# Altium PCB 飞控.PcbDoc
Units mil, origin at the board's own origin, x right, y up, seen from the top; angles counter-clockwise.
Board outline 1574.8 x 1574.8 mil, 2 copper layers (Top Layer, Bottom Layer); 50 components, 48 nets, 197 pads, 59 vias.
Unrouted connection lines stored in the file: 1.
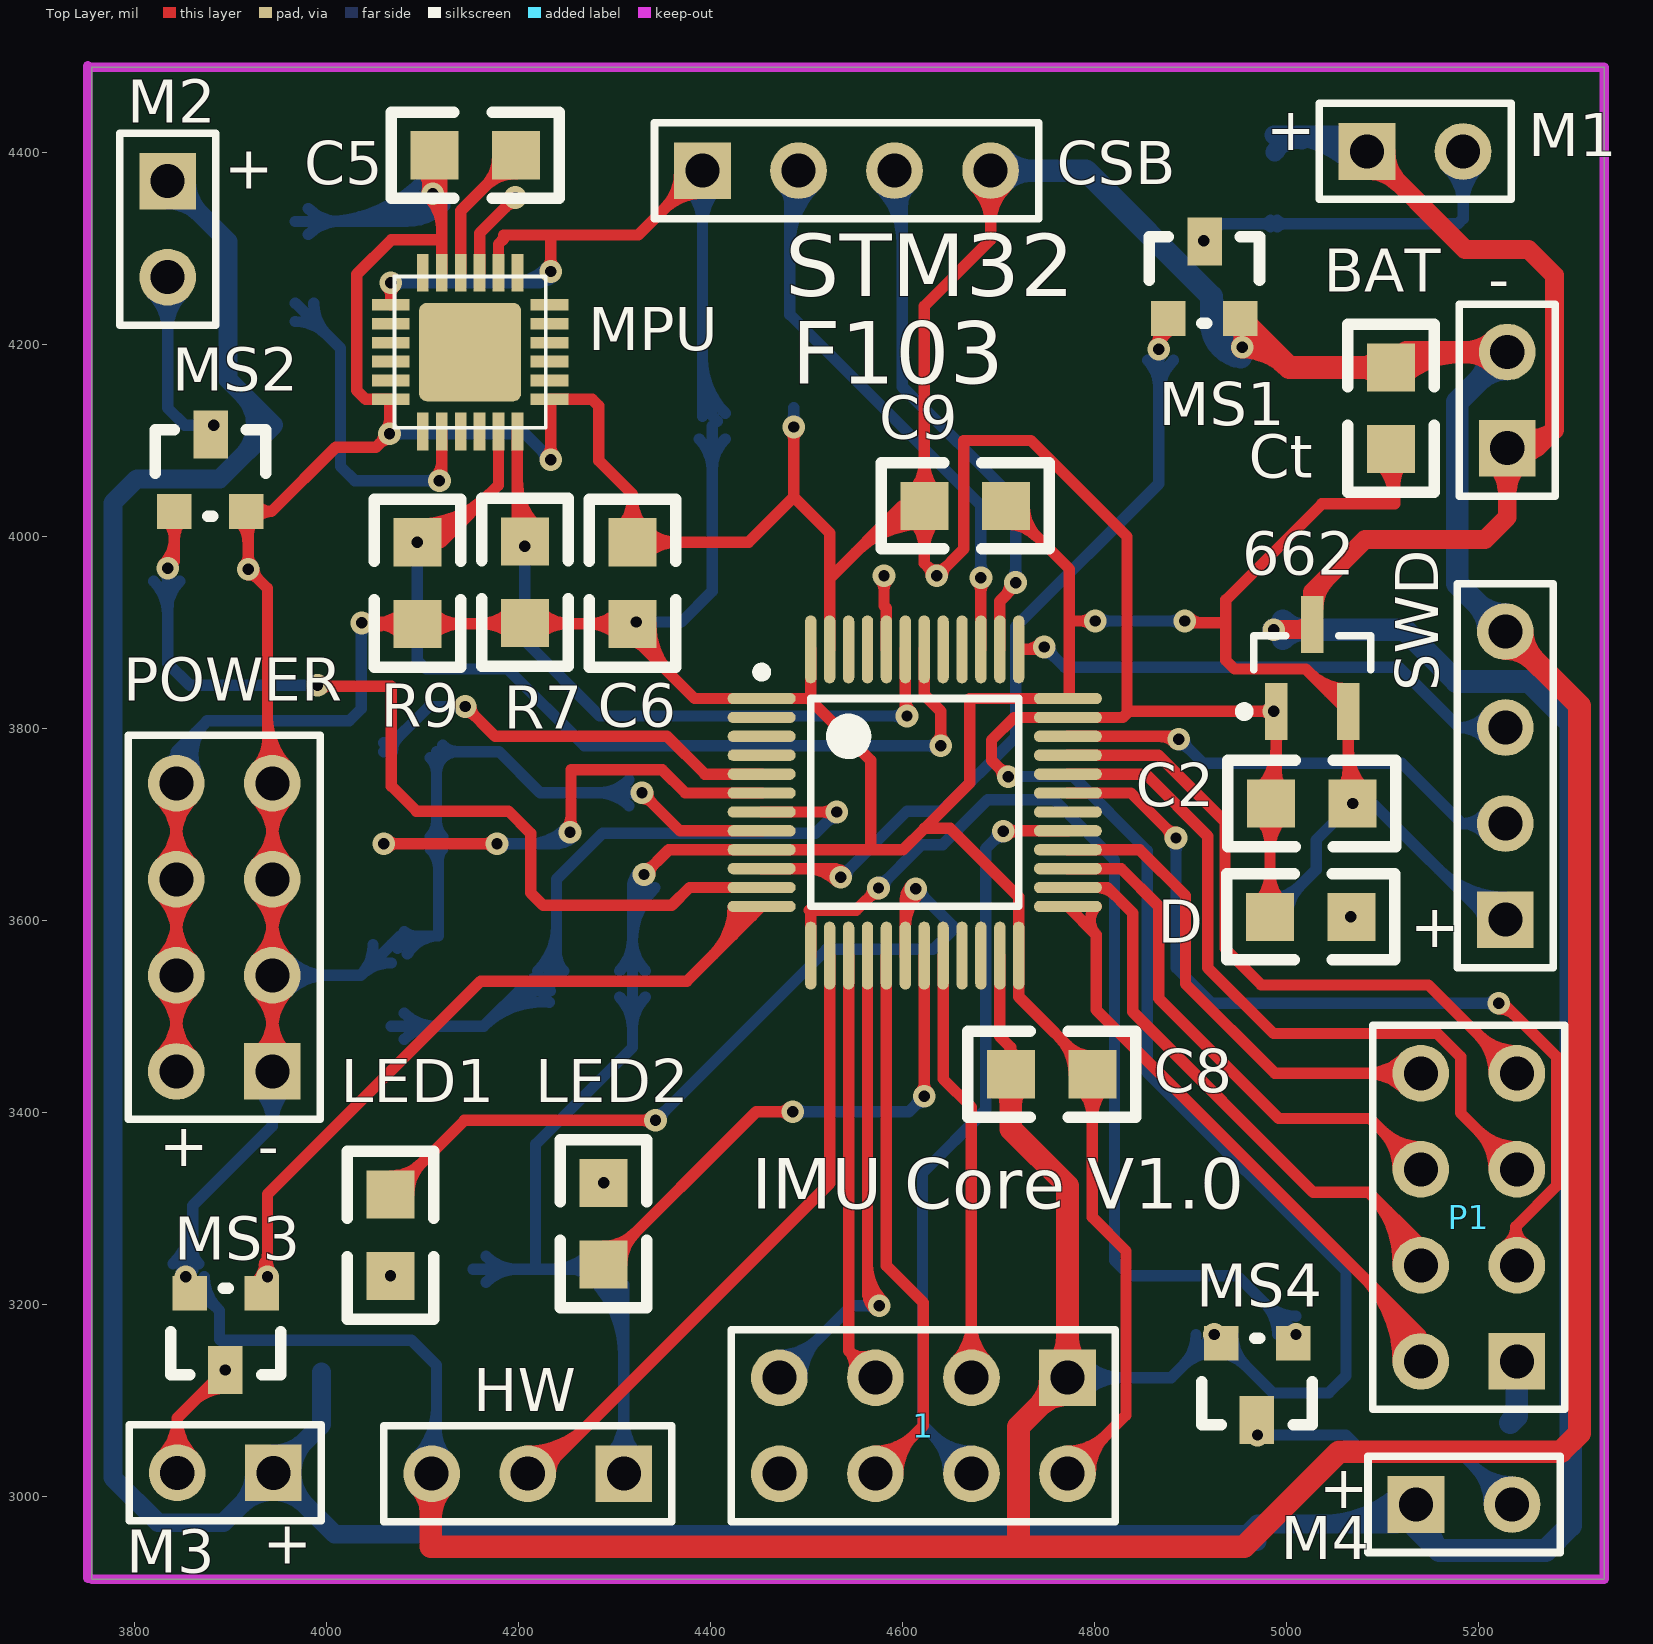
[diagram p0: Top Layer view]
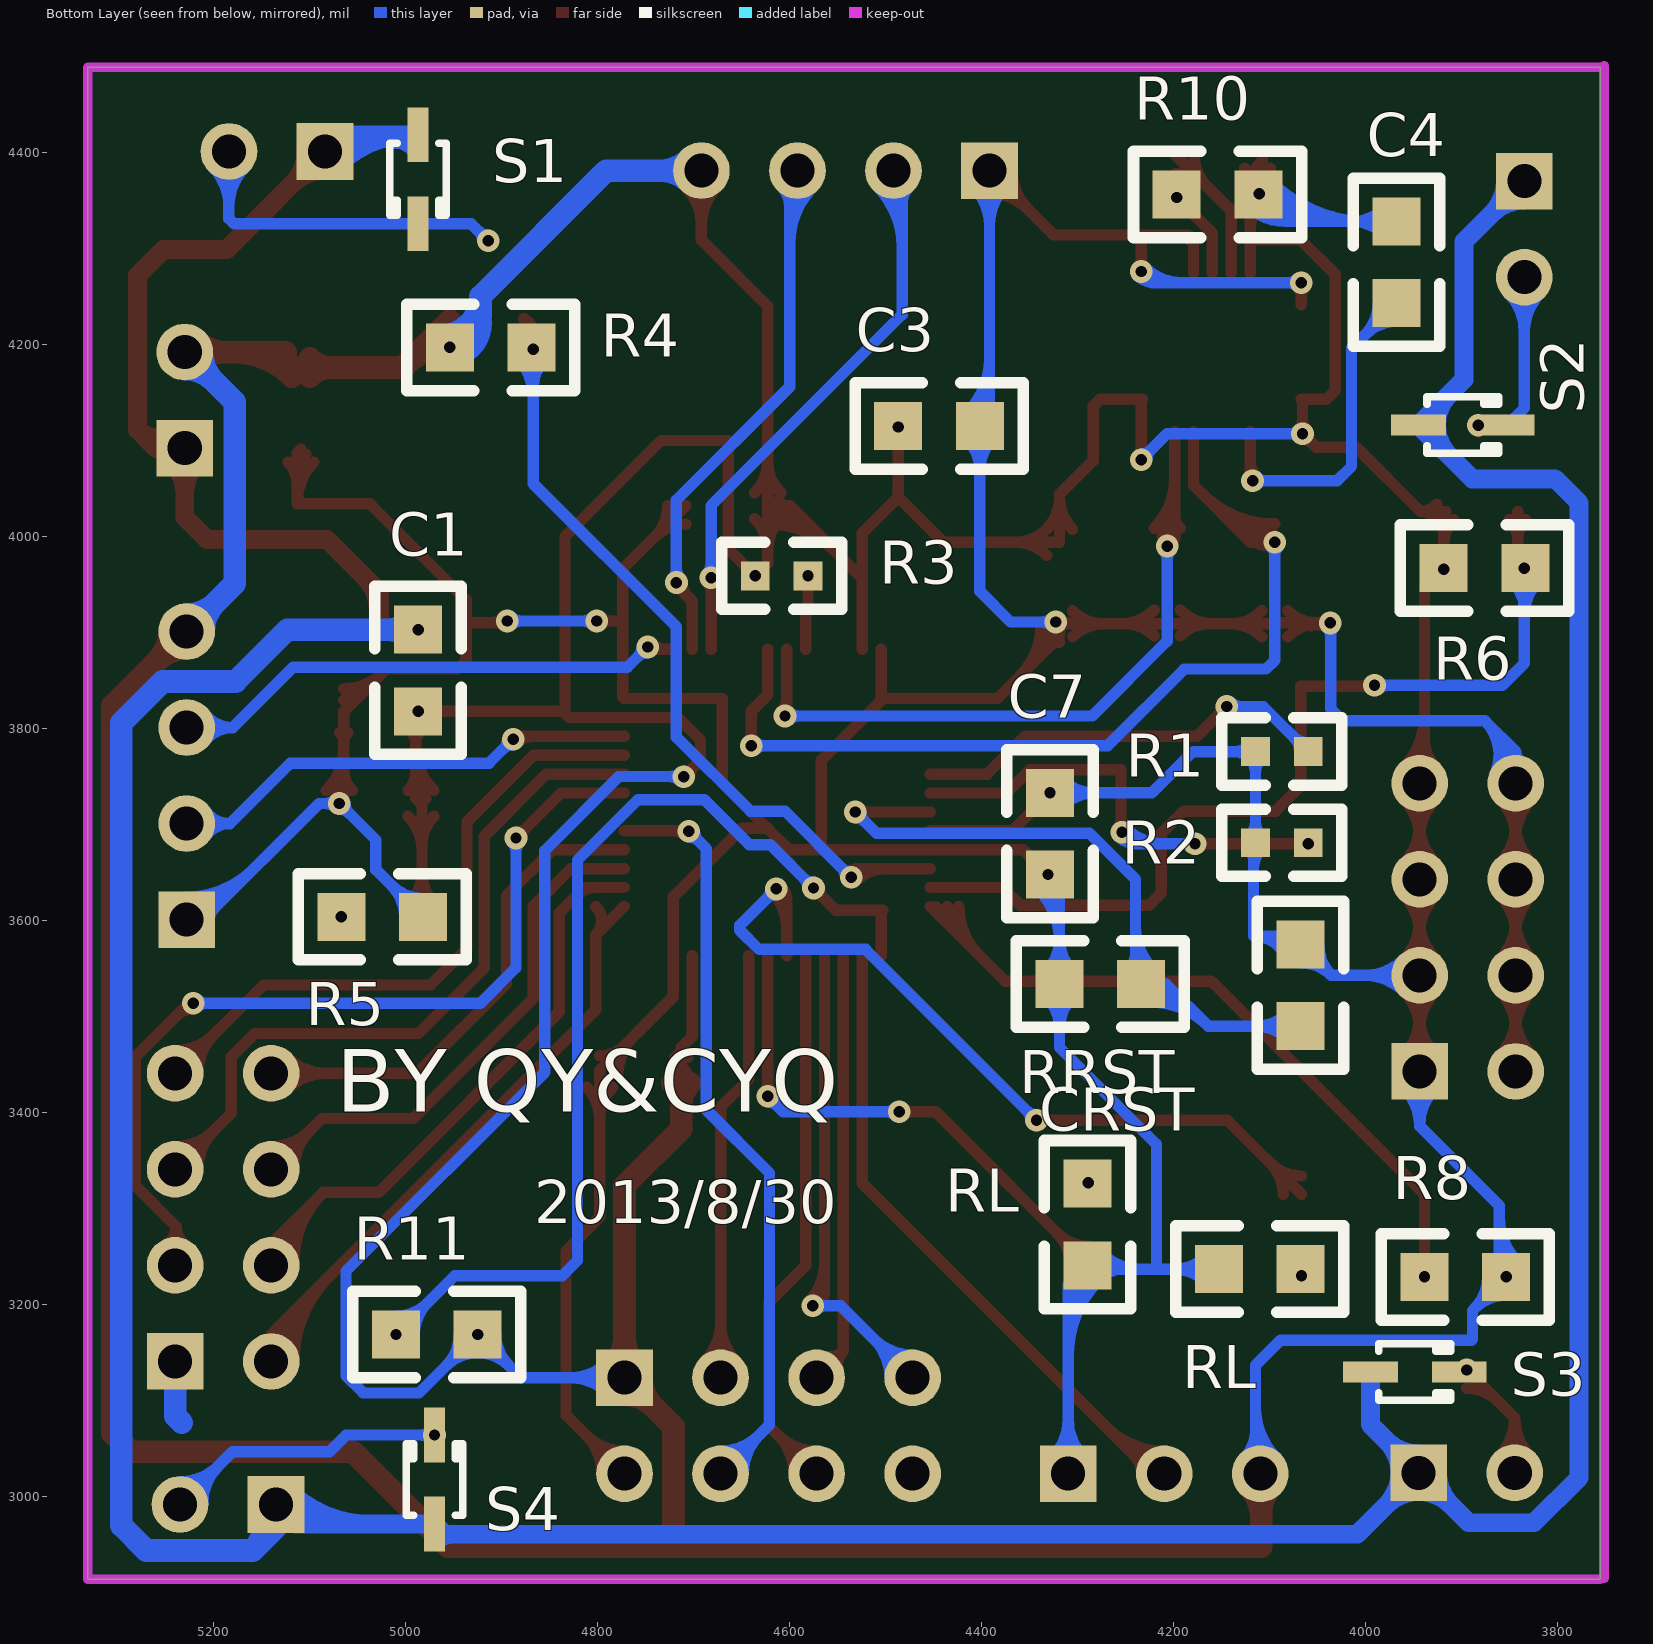
[diagram p1: Bottom Layer view, seen from below]

## Layer stack, top to bottom
Top Layer: signal copper 1.4
Dielectric: dielectric 12.6, FR-4, Dk 4.8
Bottom Layer: signal copper 1.4

## Board outline
3756,4488.8 3756,2914 5330.8,2914 5330.8,4488.8

## Design rules (kind name [scope] priority, off if disabled: settings)
Clearance [All] p1: gap=6
PolygonConnect [All] p1: connectstyle=Relief reliefconductorwidth=10 reliefentries=4 polygonreliefangle="90 Angle"
RoutingVias [All] p1: holewidth=11.81 width=23.62 viastyle="Through Hole" minholewidth=11.81 minwidth=23.62 maxholewidth=28 maxwidth=50
SilkscreenOverComponentPads SilkToSolderMaskClearance [IsPad] p1: minsilkscreentomaskgap=10
SolderMaskExpansion [All] p1: expansion=4
Width [All] p1: maxlimit=23.62 minlimit=10 preferedwidth=11.81
27 further rules are at their usual default settings.

## Classes and differential pairs
component class 比赛飞控: C1 C2 C3 C4 C5 C6 C7 C8 C9 CRST1 LED1 LED2 MS1 MS2 MS3 MS4 P1 P8 R1 R2 R3 R4 R5 R6 R7 R8 R9 R10 R11 S1 S2 S3 S4

## Components (designator, comment, footprint, x,y, rotation, side; value= is the part's Value field where it differs from the comment)
1 "24L01" HDR2X4 4772,3124 r180 top
662 "6206" SOT346-3AN 5027,3863 r90 top (schematic designator u2)
BAT "Header 2" HDR1X2 5230,4092 r90 top (schematic designator BAT1)
C1 "Cap" 0805 4987,3898 r270 bottom
C2 "Cap" 0805 5064,3722 r180 top
C3 "Cap" 0805 4407,4115 r0 bottom
C4 "Cap" 0805 3968,4248 r90 bottom
C5 "Cap" 0805 4118,4397 r0 top
C6 "Cap" 0805 4319,3989 r270 top
C7 "Cap" 0805 4329,3728 r270 bottom
C8 "Cap" 0805 4718,3440 r0 top
C9 "Cap" 0805 4628,4032 r0 top
CRST "Cap" 0805 4068,3495 r90 bottom (schematic designator CRST1)
CSB "" HDR1X4 4392,4381 r0 top (schematic designator CSB1)
Ct "Cap" 0805 5109,4171 r270 top (schematic designator Ctan1)
D "LED" 0805 5063,3604 r180 top (schematic designator D1)
HW "Header 3" HDR1X3 4310,3024 r180 top (schematic designator HW1)
LED1 "LED" 0805 4067,3235 r90 top
LED2 "LED" 0805 4289,3322 r270 top
M1 "Header 2" HDR1X2 5084,4401 r0 top (schematic designator P2)
M2 "Header 2" HDR1X2 3835,4370 r270 top (schematic designator P3)
M3 "Header 2" HDR1X2 3945,3025 r180 top (schematic designator P4)
M4 "Header 2" HDR1X2 5135,2992 r0 top (schematic designator P5)
MPU "MPU6050" QFN-24 4150,4192 r180 top (schematic designator U3)
MS1 "TP2302" SOT-23 4877,4227 r0 top
MS2 "TP2302" SOT-23 3842,4026 r0 top
MS3 "TP2302" SOT-23 3933,3212 r180 top
MS4 "TP2302" SOT-23 5007,3160 r180 top
P1 "Header 4X2" HDR2X4 5240,3141 r90 top
POWER "Power" HDR2X4 3944,3443 r90 top (schematic designator POWER1)
R1 "Res1" 0603 4115,3776 r180 bottom
R2 "Res1" 0603 4115,3681 r180 bottom
R3 "Res1" 0603 4636,3959 r180 bottom
R4 "Res2" 0805 4874,4197 r0 bottom
R5 "Res1" 0805 5062,3604 r180 bottom
R6 "Res2" 0805 3839,3967 r0 bottom
R7 "Res1" 0805 4207,3990 r270 top
R8 "Res2" 0805 3934,3229 r180 bottom
R9 "Res1" 0805 4095,3989 r270 top
R10 "Res1" 0805 4117,4356 r0 bottom
R11 "Res2" 0805 5005,3169 r180 bottom
RL "Res1" 0805 4290,3246 r90 bottom (schematic designator RLED2)
RL "Res1" 0805 4148,3237 r180 bottom (schematic designator RLED1)
RRST "Res1" 0805 4239,3534 r0 bottom (schematic designator RRST1)
S1 "ss14" SOD-323 4987,4372 r270 bottom
S2 "ss14" SOD-323 3899,4116 r180 bottom
S3 "ss14" SOD-323 3949,3130 r180 bottom
S4 "ss14" SOD-323 4970,3018 r90 bottom
STM32 "STM32F103CBT6" LQFP48_N 4613,3723 r0 top (schematic designator U1)
SWD "Header 4" HDR1X4 5228,3601 r90 top (schematic designator SWD1)

## Footprints (in the part's own frame and the unit in brackets; to place one, negate y for a bottom-side part, rotate by r counter-clockwise, add the part's x,y. Pads: shape width x height; smd on the part's side, far side on the other; paste and mask are expansions set on the pad)
0603 [mil]
  rect 30x30 smd: 1(0,0) 2(55,0)
  silkscreen extent -35,-35 90,35
0805 [mil]
  rect 50x50 smd: 1(-5,0) 2(80,0)
  silkscreen extent -50,-45 125,45
HDR1X2 [mm] "Connector; Header; 2"
  rect 1.5x1.5 hole 0.9: 1(0,0)
  round 1.5 hole 0.9: 2(2.54,0)
  silkscreen extent -1.27,-1.27 3.81,1.27
HDR1X3 [mm] "Connector; Header; 3"
  rect 1.5x1.5 hole 0.9: 1(0,0)
  round 1.5 hole 0.9: 2(2.54,0) 3(5.08,0)
  silkscreen extent -1.27,-1.27 6.35,1.27
HDR1X4 [mm] "Connector; Header; 4"
  rect 1.5x1.5 hole 0.9: 1(0,0)
  round 1.5 hole 0.9: 2(2.54,0) 3(5.08,0) 4(7.62,0)
  silkscreen extent -1.27,-1.27 8.89,1.27
HDR2X4 [mm] "Connector; Header; 4x2"
  rect 1.5x1.5 hole 0.9: 1(0,0)
  round 1.5 hole 0.9: 2(0,2.54) 3(2.54,0) 4(2.54,2.54) 5(5.08,0) 6(5.08,2.54) 7(7.62,0) 8(7.62,2.54)
  silkscreen extent -1.27,-1.27 8.89,3.81
LQFP48_N [mm] "Thin QFP, 48-Leads, Body 7x7mm, Pitch 0.5mm, IPC Mediu"
  oval 1.8x0.3 smd: 1(-4.05,2.75) 2(-4.05,2.25) 3(-4.05,1.75) 4(-4.05,1.25) 5(-4.05,0.75) 6(-4.05,0.25) 7(-4.05,-0.25) 8(-4.05,-0.75) 9(-4.05,-1.25) 10(-4.05,-1.75) 11(-4.05,-2.25) 12(-4.05,-2.75) 25(4.05,-2.75) 26(4.05,-2.25) 27(4.05,-1.75) 28(4.05,-1.25) 29(4.05,-0.75) 30(4.05,-0.25) 31(4.05,0.25) 32(4.05,0.75) 33(4.05,1.25) 34(4.05,1.75) 35(4.05,2.25) 36(4.05,2.75)
  oval 0.3x1.8 smd: 13(-2.75,-4.05) 14(-2.25,-4.05) 15(-1.75,-4.05) 16(-1.25,-4.05) 17(-0.75,-4.05) 18(-0.25,-4.05) 19(0.25,-4.05) 20(0.75,-4.05) 21(1.25,-4.05) 22(1.75,-4.05) 23(2.25,-4.05) 24(2.75,-4.05) 37(2.75,4.05) 38(2.25,4.05) 39(1.75,4.05) 40(1.25,4.05) 41(0.75,4.05) 42(0.25,4.05) 43(-0.25,4.05) 44(-0.75,4.05) 45(-1.25,4.05) 46(-1.75,4.05) 47(-2.25,4.05) 48(-2.75,4.05)
  silkscreen extent -4.17,-2.75 2.75,3.57, body extent -3.5,-3.5 3.5,3.5, height 1.6
QFN-24 [mm]
  rrect15% 2.7x2.6 smd: 0(0,0)
  rect 1x0.31 smd: 1(-2.1,1.25) 2(-2.1,0.75) 3(-2.1,0.25) 4(-2.1,-0.25) 5(-2.1,-0.75) 6(-2.1,-1.25) 13(2.1,-1.25) 14(2.1,-0.75) 15(2.1,-0.25) 16(2.1,0.25) 17(2.1,0.75) 18(2.1,1.25)
  rect 0.31x1 smd: 7(-1.25,-2.1) 8(-0.75,-2.1) 9(-0.25,-2.1) 10(0.25,-2.1) 11(0.75,-2.1) 12(1.25,-2.1) 19(1.25,2.1) 20(0.75,2.1) 21(0.25,2.1) 22(-0.25,2.1) 23(-0.75,2.1) 24(-1.25,2.1)
  silkscreen extent -2,-2 2,2
SOD-323 [mm] "SOD-323/SC-76; 2 Leads; Body 1.7 x 1.3"
  rect 1.45x0.55 smd: 1(1.175,0) 2(-1.175,0)
  silkscreen extent -0.95,-0.75 0.95,0.75
SOT346-3AN [mm] "SOT346, 3-Leads, Body 2.9x1.5mm, Pitch 0.95mm, Lead Span 2.6mm, IPC Mediu"
  rect 1.5x0.6 smd: 1(-1.15,0.95) 2(-1.15,-0.95) 3(1.15,0)
  silkscreen extent -1.27,-1.55 0.85,1.92, body extent -0.85,-1.55 0.85,1.55, height 1.45
SOT-23 [mil]
  rect 36x36 smd: 1(0,0) 2(75,0)
  rect 36x50 smd: 3(38,80)
  silkscreen extent -20,-5 95,85

## Part data
1 POWER: library part "Header 4X2", "Header, 4-Pin, Dual row"
BAT M1 M2 M3 M4: "Header, 2-Pin"
CSB: library part "Header 4", "Header, 4-Pin"
D LED1 LED2: library part LED3, "T"
HW: "Header, 3-Pin"
MPU: "Hex-A"
P1: "Header, 4-Pin, Dual row"
S1 S2 S3 S4: library part "Diode 1N5406", "3 Amp General Purpose Rectifier"
STM32: "STM32 ARM-based 32-bit MCU with 128 Kbytes Flash, 48-pin LQFP, Industrial Temperature"
SWD: "Header, 4-Pin"

## Via types
v1: diameter 23.62, hole 11.81, Top Layer to Bottom Layer, 59 vias

## Nets (pads, with @x,y where several pads share a name; then routed paths per layer and width w, separated by ;. In a path a pad name is that pad's centre, name@x,y a point inside that pad or via, vN(x,y) a via of type N, cw(c..) or ccw(c..) an arc to the next point about the centre after c; other vN are vias at no path point)
CE: 1.3 STM32.20 | length 541.3
  Top Layer w11.81: STM32.20 4642.53,3435.2 4672,3405.73 1.3 ; 1.3@4655.3,3140.7 ccw(c4614.97,3181.03) 4672,3181.03 ccw(c4729.03,3181.03) 1.3@4688.7,3140.7
CSN: 1.4 STM32.29 | length 926.9
  Top Layer w11.81: v1(4705,3693) 4705.47,3693.47 STM32.29 ; v1@4709.18,3688.82 cw(c4720.4,3677.6) 4720.4,3693.47 ; v1@4709.18,3697.18 ccw(c4718.12,3706.12) 4718.12,3693.47
  Bottom Layer w11.81: 1.4@4648.38,3024 ccw(c4591.35,3024) 4631.67,3064.33 ccw(c4672,3104.65) 1.4@4672,3047.62 ; 1.4 4621,3075 4621,3337 4687,3403 4687,3675 v1(4705,3693) ; v1@4699.09,3693 cw(c4684.84,3693) 4694.92,3682.92 cw(c4705,3672.84) v1@4705,3687.09
ECHO: CSB.3 STM32.38 | length 730.3
  Top Layer w11.81: STM32.38 4701.58,3932.58 4718,3949 v1(4718,3952) ; 4705.8,3936.8 ccw(c4690.59,3952) v1@4712.09,3952
  Bottom Layer w11.81: CSB.3@4575.3,4364.3 cw(c4515.66,4304.66) 4600,4304.66 ; CSB.3@4583.65,4372.65 cw(c4544.17,4333.17) 4600,4333.17 ; CSB.3 4600,4373 4600,4156 4718,4038 v1(4718,3952) ; 4600,4343.29 cw(c4629.71,4343.29) CSB.3@4608.7,4364.3 ; v1@4713.82,3956.18 ccw(c4703.74,3966.26) 4718,3966.26 ccw(c4732.26,3966.26) v1@4722.18,3956.18
GND: 1.1 662.1 BAT.2 C1.2 C2.2 C3.2 C4.2 C5.1 C6.1 C7.1 C8.1 C9.1 CRST.2 CSB.4 Ct.1 D.2 HW.3 MPU.1 MPU.11 MPU.18 MS1.2 MS2.2 MS3.2 MS4.2 P1.1 POWER.1 POWER.3 POWER.5 POWER.7 R1.1 R2.1 R3.1 R4.2 R6.2 R8.2 R10.1 R11.2 STM32.8 STM32.23 STM32.35 STM32.47 SWD.4 | length 15606.1
  Top Layer w11.81: MS3.2@3850.97,3223.93 cw(c3843.56,3211.54) MS3.2@3858,3211.54 ; v1(3854,3229) 3858,3225 MS3.2 ; MS2.2@3908.45,4017.45 cw(c3882.97,3991.97) 3919,3991.97 ; v1@3914.82,3970.18 ccw(c3904.74,3980.26) 3919,3980.26 ccw(c3933.26,3980.26) v1@3923.18,3970.18 ; v1@3919,3960.09 cw(c3919,3945.84) 3929.08,3955.92 cw(c3939.16,3966) v1@3924.91,3966 ; 3919,4001.63 cw(c3941.37,4001.63) MS2.2@3925.55,4017.45 ; MS2.2@3926.25,4018.21 cw(c3943,4004.1) 3943,4026 ; MS2.2@3926.25,4033.79 ccw(c3943,4047.9) 3943,4026 ; POWER.1@3927.3,3459.7 ccw(c3886.97,3500.03) 3944,3500.03 ccw(c4001.03,3500.03) POWER.1@3960.7,3459.7 ; POWER.3@3927.3,3526.3 cw(c3886.97,3485.97) 3944,3485.97 cw(c4001.03,3485.97) POWER.3@3960.7,3526.3 ; POWER.3@3927.3,3559.7 ccw(c3886.97,3600.03) 3944,3600.03 ccw(c4001.03,3600.03) POWER.3@3960.7,3559.7 ; POWER.5@3927.3,3626.3 cw(c3886.97,3585.97) 3944,3585.97 cw(c4001.03,3585.97) POWER.5@3960.7,3626.3 ; POWER.5@3927.3,3659.7 ccw(c3886.97,3700.03) 3944,3700.03 ccw(c4001.03,3700.03) POWER.5@3960.7,3659.7 ; POWER.7@3927.3,3726.3 cw(c3886.97,3685.97) 3944,3685.97 cw(c4001.03,3685.97) POWER.7@3960.7,3726.3 ; POWER.7@3927.3,3759.7 ccw(c3899.04,3787.96) 3939,3787.96 ; 3939,3783.59 ccw(c3984.59,3783.59) POWER.7@3952.35,3751.35 ; 3939,3812.1 ccw(c4013.1,3812.1) POWER.7@3960.7,3759.7 ; POWER.1 POWER.3 POWER.5 POWER.7 3939,3748 3939,3946 v1(3919,3966) 3919,4024 MS2.2 3943,4026 ; v1@4060.09,4107 cw(c4045.84,4107) 4055.92,4096.92 cw(c4066,4086.84) v1@4066,4101.09 ; v1@4061.82,4111.18 ccw(c4051.74,4121.26) 4066,4121.26 ccw(c4080.26,4121.26) v1@4070.18,4111.18 ; C5.1@4099.5,4383.5 cw(c4048.86,4332.86) 4120.47,4332.86 ; C5.1@4099.79,4383.21 cw(c4074.64,4356.95) v1(4111,4357) cw(c4140.47,4356.95) C5.1@4123.8,4381.25 ; C5.1@4101.27,4380.71 cw(c4076.17,4364.71) v1@4105.23,4358.28 ; v1@4105.89,4359.95 ccw(c4093.57,4367.06) 4107.31,4370.74 ; v1@4106.82,4352.82 cw(c4073.87,4319.87) 4120.47,4319.87 ; v1@4106.82,4361.18 ccw(c4096.74,4371.26) 4111,4371.26 ccw(c4125.26,4371.26) 4115.18,4361.18 cw(c4102.39,4348.39) 4120.47,4348.39 ; 4107.29,4370.8 ccw(c4121.1,4374.5) v1@4113.95,4362.11 ; v1@4107.61,4352.16 cw(c4089.39,4326.13) 4120.69,4331.65 ; C5.1@4107.85,4391.85 cw(c4077.38,4361.38) v1@4120.47,4361.38 ; v1@4108.05,4362.11 ccw(c4100.9,4374.5) 4114.71,4370.8 ; C5.1@4110.44,4378.08 cw(c4108.89,4366.6) 4120.47,4366.6 ; v1(4111,4357) C5.1@4111,4377 ; 4114.69,4370.74 ccw(c4128.42,4367.06) v1@4116.11,4359.95 ; MPU.11 4120.47,4309 ; 4120.47,4367.53 4120.47,4309 ; v1@4229.82,4084.18 ccw(c4219.74,4094.26) 4234,4094.26 ccw(c4248.26,4094.26) v1@4238.18,4084.18 ; v1(4234,4080) 4234,4141.46 MPU.1 4277.21,4142.79 4284,4136 4284,4079 4319,4044 C6.1 4440,3994 4487,4041 ; C6.1@4305.5,4007.5 ccw(c4272.9,4040.1) 4319,4040.1 ccw(c4365.1,4040.1) 4332.5,4007.5 ccw(c4365.1,4040.1) 4365.1,3994 ccw(c4365.1,3947.9) C6.1@4332.5,3980.5 ; v1@4329,3727.09 cw(c4329,3712.84) 4339.08,3722.92 cw(c4349.16,3733) v1@4334.91,3733 ; v1(4329,3733) 4368.53,3693.47 STM32.8 ; v1@4482.82,4109.82 cw(c4472.74,4099.74) 4487,4099.74 cw(c4501.26,4099.74) v1@4491.18,4109.82 ; v1(4487,4114) 4487,4041 ; STM32.47 4524.42,3956.42 ; 4551.14,3983.14 cw(c4623,3911.28) C9.1@4623,4012.91 ; 4571.3,4003.3 cw(c4623,3951.61) C9.1@4623,4024.72 ; 4591.47,4023.47 cw(c4623,3991.93) C9.1@4623,4036.53 ; C9.1@4609.5,4018.5 cw(c4576.9,3985.9) 4623,3985.9 cw(c4669.1,3985.9) C9.1@4636.5,4018.5 ; C9.1@4609.5,4045.5 ccw(c4576.9,4078.1) 4623,4078.1 ccw(c4669.1,4078.1) C9.1@4636.5,4045.5 ; v1@4630.09,3959 ccw(c4615.84,3959) 4625.92,3969.08 ccw(c4636,3979.16) 4636,3964.91 ccw(c4636,3979.16) 4646.08,3969.08 ccw(c4656.16,3959) v1@4641.91,3959 ; CSB.4@4675.3,4364.3 cw(c4634.97,4323.97) 4692,4323.97 cw(c4749.03,4323.97) CSB.4@4708.7,4364.3 ; CSB.4 4692,4309 4623,4240 C9.1 ; STM32.23 4701.58,3479.42 4713,3468 ; v1@4704.35,3749.72 ccw(c4690.09,3749.72) 4700.18,3759.8 ccw(c4710.26,3769.88) v1@4710.26,3755.62 ; C8.1@4706.03,3457.78 ccw(c4702.02,3468) 4713,3468 ; v1(4710.26,3749.72) 4693,3766.97 4693,3788 4716.58,3811.58 STM32.35 4829.58,3811.58 4834,3816 ; C8.1 4713,3468 ; C8.1@4719.97,3457.78 cw(c4723.98,3468) 4713,3468 ; v1(4925,3169) 4925,3167 MS4.2 ; MS1.2@4944.26,4217.7 cw(c4926.98,4196.93) v1@4954,4196.93 ; v1@4948.93,4200.02 ccw(c4937.27,4206.96) 4950.37,4210.47 ccw(c4963.4,4213.96) v1@4956.86,4202.17 ; v1@4949.82,4201.18 ccw(c4939.74,4211.26) 4954,4211.26 ccw(c4968.26,4211.26) v1@4958.18,4201.18 ; MS1.2 4954,4225 v1(4954,4197) ; v1@4954,4202.63 cw(c4976.37,4202.63) MS1.2@4960.55,4218.45 ; MS1.2@4956.34,4211.38 ccw(c4967.97,4208.26) v1@4958.6,4200.71 ; D.2@4969.5,3617.5 ccw(c4936.9,3650.1) 4983,3650.1 ccw(c5029.1,3650.1) D.2@4996.5,3617.5 ; C2.2@4970.5,3708.5 cw(c4940.32,3678.32) 4983,3678.32 ; C2.2@4970.5,3735.5 ccw(c4924.39,3781.61) 4989.6,3781.61 ; 4974.68,3818 cw(c4974.68,3802.8) 662.1@4985.42,3813.55 ; v1@4976.01,3818 ccw(c4976.01,3831.32) 662.1@4985.42,3821.9 ; C2.2@4978.85,3727.15 ccw(c4952.9,3753.1) 4989.6,3753.1 ; 662.1@4982.82,3822.18 cw(c4972.74,3832.26) 4972.74,3818 cw(c4972.74,3803.74) 4982.82,3813.82 cw(c4966.47,3797.47) 662.1@4989.6,3797.47 ; D.2 4983,3721 C2.2 4989.6,3727.6 662.1 ; 4983,3673.49 cw(c5032.51,3673.49) C2.2@4997.5,3708.5 ; 662.1@4985.42,3795.83 cw(c4975.34,3785.75) 4989.6,3785.75 cw(c5003.86,3785.75) 662.1@4993.77,3795.83 ; v1(4987,3818) 4836,3818 4834,3816 ; 4989.6,3754.58 ccw(c5016.58,3754.58) C2.2@4997.5,3735.5 ; Ct.1 Ct.1@5125,4192 ; 3943,4026 4010,4093 4052,4093 v1(4066,4107) 4066,4141.46 MPU.18 4041.21,4142.79 4032,4152 4032,4273 4068,4309 4120.47,4309 ; 4487,4041 4524.42,4003.58 4524.42,3956.42 ; 4524.42,3956.42 4600,4032 C9.1 ; C9.1 4623,3972 v1(4636,3959) 4664,3987 4664,4100 4734,4100 4834,4000 4834,3816 ; 4120.47,4368.94 cw(c4141.06,4368.94) 4126.5,4383.5 ccw(c4141.06,4368.94) 4120.47,4368.94
  Top Layer w23.62: HW.3@4097.47,3011.47 cw(c4069.64,2983.64) 4109,2983.64 ; 4109,2978.81 cw(c4155.19,2978.81) HW.3@4122.53,3011.47 ; HW.3 4109,3023 4109,2948 4721,2948 ; C8.1@4703.67,3430.67 cw(c4681.16,3408.16) 4713,3408.16 cw(c4744.84,3408.16) C8.1@4722.33,3430.67 ; C8.1 4713,3383 4772,3324 1.1 4721,3073 4721,2948 ; 1.1@4754.28,3124 cw(c4711.51,3124) 4741.76,3093.76 cw(c4772,3063.51) 1.1@4772,3106.28 ; 1.1@4759.47,3136.53 ccw(c4729.23,3166.77) 4772,3166.77 ccw(c4814.77,3166.77) 1.1@4784.53,3136.53 ; v1(4954,4197) cw(c4954,4129.4) 5001.8,4177.2 ; MS1.2@4954,4225 5003,4176 Ct.1 ; Ct.1@5099.67,4166.67 ccw(c5077.16,4144.16) 5077.16,4176 ccw(c5077.16,4207.84) Ct.1@5099.67,4185.33 ; Ct.1@5118.33,4166.67 cw(c5179.47,4105.53) 5179.47,4192 ; Ct.1@5125,4192 BAT.2 ; BAT.2@5217.47,4179.47 ccw(c5187.23,4149.23) 5187.23,4192 ccw(c5187.23,4234.77) BAT.2@5217.47,4204.53 ; SWD.4@5228,3883.28 cw(c5228,3840.51) 5258.24,3870.76 cw(c5288.49,3901) SWD.4@5245.72,3901 ; SWD.4 5305.15,3823.85 5305.15,3066.15 5286,3047 5055,3047 4956,2948 4721,2948
  Bottom Layer w11.81: R8.2@3840.5,3242.5 ccw(c3791,3292) 3861,3292 ; R8.2@3848.85,3234.15 ccw(c3819.52,3263.48) 3861,3263.48 ; R8.2@3849.82,3233.18 ccw(c3822.84,3260.16) 3861,3260.16 ; R8.2@3854,3209.91 cw(c3854,3163.81) 3886.6,3196.4 cw(c3919.19,3229) R8.2@3873.09,3229 ; R8.2@3854,3223.09 cw(c3854,3208.84) 3864.08,3218.92 cw(c3874.16,3229) R8.2@3859.91,3229 ; R8.2@3857.56,3249.23 ccw(c3870.5,3241.75) R8.2@3858.67,3232.61 ; 3861,3258.2 ccw(c3883.2,3258.2) R8.2@3867.5,3242.5 ; v1(3919,3966) R6.2 ; POWER.1@3927.3,3426.29 cw(c3887.05,3386) 3944,3386 ; POWER.1 3944,3386 ; POWER.3 4036,3543 ; POWER.1@3960.7,3426.29 ccw(c4000.95,3386) 3944,3386 ; POWER.3@3960.7,3526.3 cw(c4001.03,3485.97) 4001.03,3543 cw(c4001.03,3600.03) POWER.3@3960.7,3559.7 ; C4.2 4082,4328 ; C4.2@3981.5,4314.5 cw(c4014.1,4281.9) 4014.1,4328 cw(c4014.1,4374.1) C4.2@3981.5,4341.5 ; 3998.3,4328 ccw(c3998.3,4469.7) R10.1@4098.5,4369.5 ; 4026.82,4328 ccw(c4026.82,4441.18) R10.1@4106.85,4361.15 ; CRST.2@4048.91,3574.75 cw(c4004.84,3574.17) 4036,3543 ; 4055.33,4328 ccw(c4055.33,4412.67) R10.1@4115.2,4352.8 ; v1(4066,4107) 4207,4107 v1(4234,4080) ; CRST.2@4067.75,3555.91 ccw(c4067.17,3511.84) 4036,3543 ; v1@4070.18,4102.82 cw(c4080.26,4092.74) 4080.26,4107 cw(c4080.26,4121.26) v1@4070.18,4111.18 ; CRST.2@4074.29,3571.32 cw(c4096.4,3558.38) 4096.4,3584 ; CRST.2@4081.5,3588.5 ccw(c4092.37,3599.37) CRST.2@4092.37,3584 ; 4083.85,4328 ccw(c4083.85,4384.15) R10.1@4123.55,4344.45 ; 4084.33,4346.35 cw(c4102.95,4318.04) R10.1@4109.81,4351.22 ; CRST.2@4084.48,3565.35 cw(c4117,3546.32) 4117,3584 ; R10.1@4089.52,4337.97 ccw(c4072.6,4367.29) R10.1@4105.3,4358.53 ; R10.1@4092.91,4355.45 cw(c4055.62,4354.38) 4082,4328 ; HW.3@4093.3,3040.7 ccw(c4040.9,3093.1) 4115,3093.1 ; HW.3@4101.65,3032.35 ccw(c4069.41,3064.59) 4115,3064.59 ; R10.1@4105.09,4357 cw(c4090.84,4357) 4100.92,4346.92 cw(c4111,4336.84) R10.1@4111,4351.09 ; R2.1@4108.57,3674.57 cw(c4088.22,3654.22) 4117,3654.22 ; R2.1@4108.57,3687.43 ccw(c4093.04,3702.96) 4115,3702.96 ccw(c4136.96,3702.96) R2.1@4121.43,3687.43 ; R1.1@4108.57,3769.57 cw(c4093.04,3754.04) 4115,3754.04 cw(c4136.96,3754.04) 4121.43,3769.57 cw(c4136.96,3754.04) 4136.96,3776 cw(c4136.96,3797.96) R1.1@4121.43,3782.43 ; R10.1@4109.3,4337.1 ccw(c4104.74,4305.26) 4082,4328 ; HW.3 4115,3029 4115,3137 4089,3163 3890,3163 3889,3164 3889,3194 v1(3854,3229) 3861,3236 3861,3303 3944,3386 ; v1(4111,4357) 4082,4328 ; 4115,3068.96 ccw(c4154.96,3068.96) HW.3@4126.7,3040.7 ; 4117,3663.87 cw(c4132.13,3663.87) R2.1@4121.43,3674.57 ; v1@4228.09,4080 ccw(c4213.84,4080) 4223.92,4090.08 ccw(c4234,4100.16) v1@4234,4085.91 ; C7.1@4315.5,3719.5 ccw(c4282.9,3686.9) 4282.9,3733 ccw(c4282.9,3779.1) C7.1@4315.5,3746.5 ; C7.1@4324.82,3728.82 ccw(c4314.74,3718.74) 4314.74,3733 ccw(c4314.74,3747.26) C7.1@4324.82,3737.18 ; v1(4329,3733) 4223,3733 4180,3776 R1.1 R2.1 4117,3679 4117,3584 ; C3.2@4482.82,4118.18 ccw(c4472.74,4128.26) 4487,4128.26 ccw(c4501.26,4128.26) C3.2@4491.18,4118.18 ; v1(4487,4114) C3.2 C3.2@4487,4134 ; v1(4710.26,3749.72) 4710.54,3750 4778,3750 4855,3673 4855,3442 5062,3235 5062,3126 5044,3108 4986,3108 v1(4925,3169) 4880,3124 1.1 ; v1@4714.43,3745.54 cw(c4725.2,3734.77) 4725.2,3750 ; v1@4714.43,3753.89 ccw(c4723.83,3763.29) 4723.83,3750 ; 1.1@4788.7,3107.3 cw(c4829.03,3066.97) 4829.03,3124 cw(c4829.03,3181.03) 1.1@4788.7,3140.7 ; R11.2@4905.91,3169 cw(c4859.81,3169) 4892.4,3136.4 cw(c4925,3103.81) 4925,3149.91 cw(c4925,3103.81) 4957.6,3136.4 cw(c4990.19,3169) R11.2@4944.09,3169 ; R11.2@4919.09,3169 cw(c4904.84,3169) 4914.92,3158.92 cw(c4925,3148.84) 4925,3163.09 cw(c4925,3148.84) 4935.08,3158.92 cw(c4945.16,3169) R11.2@4930.91,3169 ; 4036,3543 CRST.2 4077,3584 4117,3584
  Bottom Layer w23.62: CSB.4 4791,4381 4922,4250 ; CSB.4@4704.53,4368.47 cw(c4734.77,4338.23) 4734.77,4381 cw(c4734.77,4423.77) CSB.4@4704.53,4393.53 ; 4922,4222.29 ccw(c4958.05,4222.29) R4.2@4952.35,4186.7 ; R4.2@4940.81,4197 ccw(c4908.97,4197) 4931.48,4219.52 ccw(c4954,4242.03) R4.2@4954,4210.19 ; v1(4954,4197) 4922,4229 4922,4250 ; R4.2@4956.08,4210.02 cw(c4962.48,4250) 4922,4250 ; SWD.4@5210.28,3901 ccw(c5167.51,3901) 5197.76,3931.24 ccw(c5228,3961.49) SWD.4@5228,3918.72 ; BAT.2@5212.28,4192 cw(c5169.51,4192) 5199.76,4161.76 cw(c5230,4131.51) BAT.2@5230,4174.28 ; SWD.4 5178,3951 5178,4140 BAT.2 ; 5233,3077 5240,3084 P1.1
IRQ: 1.8
JSG: HW.2 STM32.14 | length 811.5
  Top Layer w11.81: HW.2 4222,3024 4524.42,3326.42 STM32.14 ; HW.2@4210,3035.81 ccw(c4210,3093.3) 4250.65,3052.65 ; HW.2@4210,3047.62 ccw(c4210,3133.62) 4270.81,3072.81 ; HW.2@4233.62,3024 cw(c4261.68,3024) 4241.84,3043.84
MISO: 1.7 STM32.16 | length 704.5
  Top Layer w11.81: 4563.79,3214.23 ccw(c4591.23,3214.23) v1@4571.82,3194.82 ; 4563.79,3242.74 ccw(c4619.74,3242.74) v1@4580.18,3203.18 ; STM32.16 4563.79,3211.21 v1(4576,3199) ; v1@4570.09,3199 ccw(c4555.84,3199) 4565.92,3209.08 ccw(c4576,3219.16) v1@4576,3204.91
  Bottom Layer w11.81: 1.7 4547,3199 v1(4576,3199) ; 1.7@4472,3147.62 ccw(c4472,3204.65) 4512.33,3164.33 ccw(c4552.65,3124) 1.7@4495.62,3124 ; v1@4571.82,3194.82 ccw(c4561.74,3184.74) 4561.74,3199 ccw(c4561.74,3213.26) v1@4571.82,3203.18
MOSI: 1.6 STM32.17 | length 665.8
  Top Layer w11.81: 1.6 4622,3074 4622,3202 4583.47,3240.53 STM32.17 ; 1.6@4572,3047.62 ccw(c4572,3104.65) 4612.33,3064.33 ccw(c4652.65,3024) 1.6@4595.62,3024
NetC4_1: C4.1 MPU.20 | length 463.7
  Top Layer w11.81: v1@4113.82,4062.18 ccw(c4097.77,4078.23) 4120.47,4078.23 ; v1(4118,4058) 4120.47,4060.47 MPU.20
  Bottom Layer w11.81: C4.1@3968,4223.91 cw(c3968,4177.81) 4000.6,4210.4 cw(c4033.19,4243) C4.1@3987.09,4243 ; C4.1 4015,4196 4015,4073 4030,4058 v1(4118,4058) ; v1@4113.82,4053.82 ccw(c4103.74,4043.74) 4103.74,4058 ccw(c4103.74,4072.26) v1@4113.82,4062.18
NetC5_2: C5.2 MPU.10 | length 218.7
  Top Layer w11.81: MPU.10 4140.16,4339.16 C5.2 ; C5.2@4178.91,4397 cw(c4132.81,4397) 4165.4,4364.4 cw(c4198,4331.81) C5.2@4198,4377.91
NetCRST1_1: CRST.1 RRST.1 STM32.7 | length 1104.6
  Top Layer w11.81: STM32.7 v1(4531.84,3713.16) ; v1@4527.67,3708.98 ccw(c4517.59,3698.9) 4517.59,3713.16 ccw(c4517.59,3727.41) v1@4527.67,3717.33
  Bottom Layer w11.81: CRST.1 4164,3490 ; CRST.1@4081.5,3476.5 cw(c4114.1,3443.9) 4114.1,3490 cw(c4114.1,3536.1) CRST.1@4081.5,3503.5 ; 4181.96,3507.96 cw(c4227.87,3462.06) RRST.1@4233.38,3526.74 ; 4199.93,3525.93 cw(c4230.69,3495.16) RRST.1@4234.38,3538.51 ; RRST.1@4215.78,3528.29 ccw(c4208,3525.85) 4208,3534 ; RRST.1@4215.78,3539.71 cw(c4208,3542.15) 4208,3534 ; RRST.1@4220.5,3547.5 ccw(c4173.42,3594.58) 4240,3594.58 ; RRST.1@4228.85,3539.15 ccw(c4201.93,3566.07) 4240,3566.07 ; RRST.1@4232.38,3514.97 ccw(c4225.04,3428.96) 4164,3490 ; 4240,3565.61 ccw(c4265.61,3565.61) RRST.1@4247.5,3547.5 ; v1@4525.94,3713.16 cw(c4511.68,3713.16) 4521.76,3703.08 cw(c4531.84,3692.99) v1@4531.84,3707.25 ; v1(4531.84,3713.16) 4509.69,3691 4288,3691 4240,3643 4240,3540 RRST.1 4208,3534 ; 4164,3490 4208,3534
NetD1_1: D.1 R5.1
  other v1: 5067,3604
NetLED1_1: LED1.1 RL.2@4068,3237
  other v1: 4067,3230
NetLED1_2: LED1.2 STM32.18 | length 1051.7
  Top Layer w11.81: LED1.2 4144,3392 v1(4343,3392) ; LED1.2@4067,3334.09 ccw(c4067,3380.19) 4099.6,3347.6 ccw(c4132.19,3315) LED1.2@4086.09,3315 ; v1@4338.82,3387.82 ccw(c4328.74,3377.74) 4328.74,3392 ccw(c4328.74,3406.26) v1@4338.82,3396.18 ; STM32.18 4603.16,3622.16 v1(4614,3633) ; STM32.18@4603.16,3592.57 cw(c4654.43,3592.57) v1@4618.18,3628.82 ; 4603.16,3621.08 cw(c4625.92,3621.08) v1@4609.82,3637.18 ; v1@4608.09,3633 cw(c4593.84,3633) 4603.92,3622.92 cw(c4614,3612.84) v1@4614,3627.09
  Bottom Layer w11.81: v1(4343,3392) 4521,3570 4632,3570 4652,3590 4652,3595 v1(4614,3633) ; v1@4343,3397.91 ccw(c4343,3412.16) 4353.08,3402.08 ccw(c4363.16,3392) v1@4348.91,3392 ; v1@4614,3627.09 cw(c4614,3612.84) 4624.08,3622.92 cw(c4634.16,3633) v1@4619.91,3633
NetLED2_1: LED2.1 RL.2@4290,3326
  other v1: 4289,3327
NetLED2_2: LED2.2 STM32.19 | length 715.1
  Top Layer w11.81: LED2.2 4448,3401 v1(4486,3401) ; LED2.2@4289,3261.09 ccw(c4289,3307.19) 4321.6,3274.6 ccw(c4354.19,3242) LED2.2@4308.09,3242 ; v1@4481.82,3396.82 ccw(c4471.74,3386.74) 4471.74,3401 ccw(c4471.74,3415.26) v1@4481.82,3405.18 ; v1@4618.82,3421.18 ccw(c4608.74,3431.26) 4623,3431.26 ccw(c4637.26,3431.26) v1@4627.18,3421.18 ; STM32.19 4623,3563.39 v1(4623,3417)
  Bottom Layer w11.81: v1(4486,3401) 4607,3401 v1(4623,3417) ; v1@4490.18,3396.82 cw(c4500.26,3386.74) 4500.26,3401 cw(c4500.26,3415.26) v1@4490.18,3405.18 ; v1@4617.09,3417 cw(c4602.84,3417) 4612.92,3406.92 cw(c4623,3396.84) v1@4623,3411.09
NetMS1_3: M1.2 MS1.3 S1.1 | length 500.2
  Top Layer w11.81: v1(4914,4308) MS1.3
  Bottom Layer w11.81: v1(4914,4308) 4931.74,4325.74 S1.1 5178.74,4325.74 5184,4331 M1.2 ; v1@4914,4313.91 ccw(c4914,4328.16) 4924.08,4318.08 ccw(c4934.16,4308) v1@4919.91,4308 ; S1.1@4983.52,4322.26 ccw(c4975.12,4313.86) 4975.12,4325.74 ccw(c4975.12,4337.62) S1.1@4983.52,4329.22 ; S1.1@4990.48,4322.26 cw(c4998.88,4313.86) 4998.88,4325.74 cw(c4998.88,4337.62) S1.1@4990.48,4329.22 ; M1.2@5167.3,4384.3 cw(c5126.97,4343.97) 5184,4343.97 cw(c5241.03,4343.97) M1.2@5200.7,4384.3
NetMS2_3: M2.2 MS2.3 S2.1 | length 329.2
  Top Layer w11.81: MS2.3@3883,4109 v1(3883,4116)
  Bottom Layer w11.81: M2.2@3818.3,4253.3 cw(c3777.97,4212.97) 3835,4212.97 cw(c3892.03,4212.97) M2.2@3851.7,4253.3 ; M2.2 3835,4133.74 S2.1 v1(3883,4116) ; S2.1@3873.94,4112.52 cw(c3882.34,4104.12) 3882.34,4116 cw(c3882.34,4127.88) S2.1@3873.94,4119.48 ; S2.1@3878.82,4111.82 ccw(c3868.74,4101.74) 3868.74,4116 ccw(c3868.74,4130.26) S2.1@3878.82,4120.18
NetMS3_3: M3.2 MS3.3 S3.1 | length 275.8
  Top Layer w11.81: M3.2@3828.3,3041.71 ccw(c3788.05,3082) 3845,3082 ; M3.2 3845,3082 ; M3.2@3861.7,3041.71 cw(c3901.95,3082) 3845,3082 ; 3862.4,3099.4 cw(c3895,3066.81) MS3.3@3895,3112.91 ; MS3.3@3889.09,3132 cw(c3874.84,3132) 3884.92,3121.92 cw(c3895,3111.84) MS3.3@3895,3126.09 ; v1(3895,3132) 3845,3082
NetMS4_3: M4.2 MS4.3 S4.1 | length 464.1
  Top Layer w11.81: MS4.3@4965.82,3068.44 ccw(c4955.74,3078.52) 4970,3078.52 ccw(c4984.26,3078.52) MS4.3@4974.18,3068.44 ; MS4.3 4970,3079 v1(4970,3064.26)
  Bottom Layer w11.81: v1(4970,3064.26) 5061.74,3064.26 5079,3047 5180,3047 M4.2 ; S4.1@4973.48,3060.78 cw(c4981.88,3052.38) 4981.88,3064.26 cw(c4981.88,3076.14) S4.1@4973.48,3067.74 ; S4.1@4974.18,3060.08 cw(c4984.26,3050) 4984.26,3064.26 cw(c4984.26,3078.52) S4.1@4974.18,3068.44 ; M4.2@5211.38,2992 ccw(c5154.35,2992) 5194.67,3032.33 ccw(c5235,3072.65) M4.2@5235,3015.62
NetR1_2: R1.2 STM32.5 | length 521.5
  Top Layer w11.81: v1@4145,3817.09 cw(c4145,3802.84) 4155.08,3812.92 cw(c4165.16,3823) v1@4150.91,3823 ; v1(4145,3823) 4176,3792 4355,3792 4394.47,3752.53 STM32.5
  Bottom Layer w11.81: R1.2 4107,3823 v1(4145,3823) ; R1.2@4060,3785.09 ccw(c4060,3807.05) 4075.53,3791.53 ccw(c4091.05,3776) R1.2@4069.09,3776 ; v1@4140.82,3818.82 ccw(c4130.74,3808.74) 4130.74,3823 ccw(c4130.74,3837.26) v1@4140.82,3827.18
NetR2_2: R2.2 STM32.6 | length 650.3
  Top Layer w11.81: v1(4060,3680) v1(4178,3680) ; v1@4064.18,3675.82 cw(c4074.26,3665.74) 4074.26,3680 cw(c4074.26,3694.26) v1@4064.18,3684.18 ; v1@4173.82,3675.82 ccw(c4163.74,3665.74) 4163.74,3680 ccw(c4163.74,3694.26) v1@4173.82,3684.18 ; v1@4249.82,3696.18 ccw(c4237.33,3708.67) 4255,3708.67 ; v1(4254,3692) 4255,3693 4255,3757 4350,3757 4374.16,3732.84 STM32.6 ; 4255,3703.84 ccw(c4265.84,3703.84) v1@4258.18,3696.18
  Bottom Layer w11.81: v1(4060,3680) R2.2 ; v1(4178,3680) 4242,3680 v1(4254,3692) ; v1@4182.18,3675.82 cw(c4192.26,3665.74) 4192.26,3680 cw(c4192.26,3694.26) v1@4182.18,3684.18 ; 4210.77,3680 ccw(c4210.77,3735.23) v1@4249.82,3696.18 ; 4239.29,3680 ccw(c4239.29,3706.71) v1@4258.18,3687.82 ; v1@4248.09,3692 cw(c4233.84,3692) 4243.92,3681.92 cw(c4254,3671.84) v1@4254,3686.09
NetR3_2: R3.2 STM32.44 | length 100
  Top Layer w11.81: v1@4576.82,3954.82 cw(c4566.74,3944.74) 4581,3944.74 cw(c4595.26,3944.74) v1@4585.18,3954.82 ; v1(4581,3959) 4581,3928 4583.47,3925.53 STM32.44
NetR10_2: MPU.9 R10.2 | length 116.1
  Top Layer w11.81: MPU.9 4159.84,4315.84 v1(4197,4353) ; v1@4191.09,4353 cw(c4176.84,4353) 4186.92,4342.92 cw(c4197,4332.84) v1@4197,4347.09
PA9: STM32.30
PA10: P1.3 STM32.31 | length 1072.3
  Top Layer w11.81: STM32.31 4838.16,3732.84 v1(4885,3686) ; v1@4879.09,3686 ccw(c4864.84,3686) 4874.92,3696.08 ccw(c4885,3706.16) v1@4885,3691.91 ; v1@5221,3508.09 cw(c5221,3482.74) 5238.93,3500.67 ; v1(5221,3514) 5225.6,3514 5281.43,3458.16 5281.43,3323.84 5239,3281.4 ; P1.3@5227.65,3261.14 ccw(c5215.23,3281.4) 5239,3281.4 ; P1.3 5239,3242 5239,3281.4 ; P1.3@5250.83,3261.99 cw(c5260.84,3281.4) 5239,3281.4
  Bottom Layer w11.81: v1@4880.82,3681.82 cw(c4870.74,3671.74) 4885,3671.74 cw(c4899.26,3671.74) v1@4889.18,3681.82 ; v1(4885,3686) 4885,3551 4922,3514 v1(5221,3514) ; v1@5216.82,3509.82 ccw(c5206.74,3499.74) 5206.74,3514 ccw(c5206.74,3528.26) v1@5216.82,3518.18
PA11: P1.5 STM32.32 | length 842.2
  Top Layer w11.81: STM32.32 4853.47,3752.53 4918.19,3687.81 4918.19,3550.81 4986.57,3482.43 5157.16,3482.43 5181.43,3458.16 5181.43,3399.57 P1.5 ; P1.5@5216.38,3341 ccw(c5159.35,3341) 5199.67,3381.33 ccw(c5240,3421.65) P1.5@5240,3364.62
PA12: P1.7 STM32.33 | length 771.6
  Top Layer w11.81: STM32.33 4866.79,3772.21 4936,3703 4936,3571 4974,3533 5148,3533 P1.7 ; P1.7@5216.38,3441 ccw(c5159.35,3441) 5199.67,3481.33 ccw(c5240,3521.65) P1.7@5240,3464.62
PA13: STM32.34 SWD.2 | length 594.6
  Top Layer w11.81: STM32.34 4885.1,3791.9 v1(4888,3789) ; 4866.75,3791.9 cw(c4866.75,3767.75) v1@4883.82,3784.82
  Bottom Layer w11.81: v1@4888,3783.09 cw(c4888,3768.84) 4898.08,3778.92 cw(c4908.16,3789) v1@4893.91,3789 ; v1(4888,3789) 4913,3764 5120,3764 5183,3701 ; SWD.2@5208.56,3687.58 ccw(c5183,3669.95) 5183,3701 ; SWD.2@5208.56,3714.42 cw(c5183,3732.05) 5183,3701 ; SWD.2 5183,3701
PA14: STM32.37 SWD.3 | length 650.6
  Top Layer w11.81: STM32.37 4745.45,3882.45 v1(4748,3885) ; 4727.58,3882.45 ccw(c4727.58,3905.42) v1@4743.82,3889.18
  Bottom Layer w11.81: v1@4748,3879.09 cw(c4748,3864.84) 4758.08,3874.92 cw(c4768.16,3885) v1@4753.91,3885 ; v1(4748,3885) 4769,3864 5117,3864 5180,3801 ; SWD.3@5209.28,3786.59 ccw(c5180,3764.05) 5180,3801 ; SWD.3@5209.28,3815.41 cw(c5180,3837.95) 5180,3801 ; SWD.3 5180,3801
PB6: MPU.23 R9.1 STM32.42 | length 1295
  Top Layer w11.81: R9.1@4095,3989.47 ccw(c4095,4038.9) 4129.95,4003.95 ; v1(4095,3994) 4120,3994 4179.53,4053.53 MPU.23 ; R9.1@4095,4001.28 ccw(c4095,4079.22) 4150.11,4024.11 ; R9.1@4095,4013.09 ccw(c4095,4119.55) 4170.27,4044.27 ; R9.1@4099.18,3989.82 cw(c4109.26,3979.74) 4109.26,3994 cw(c4109.26,4008.26) R9.1@4099.18,3998.18 ; R9.1@4099.38,3997.97 ccw(c4109.02,4006.71) R9.1@4112.4,3994.13 ; R9.1@4100.11,3991.05 cw(c4133.26,3971.91) 4123.36,4008.88 ; STM32.42 4622.84,3835.16 4640,3818 v1(4640,3782) ; v1@4635.82,3786.18 ccw(c4625.74,3796.26) 4640,3796.26 ccw(c4654.26,3796.26) v1@4644.18,3786.18
  Bottom Layer w11.81: v1@4090.82,3989.82 cw(c4080.74,3979.74) 4095,3979.74 cw(c4109.26,3979.74) v1@4099.18,3989.82 ; v1(4095,3994) 4095,3871 4104,3862 4189,3862 4269,3782 v1(4640,3782) ; v1@4635.82,3777.82 ccw(c4625.74,3767.74) 4625.74,3782 ccw(c4625.74,3796.26) v1@4635.82,3786.18
PB7: MPU.24 R7.1 STM32.43 | length 945.2
  Top Layer w11.81: R7.1@4193.5,4008.5 ccw(c4179.7,4022.3) 4199.21,4022.3 ; 4199.21,4023.06 ccw(c4240.06,4023.06) R7.1@4211.18,3994.18 ; 4199.21,4031.38 ccw(c4243.38,4031.38) R7.1@4212.15,4000.15 ; 4199.21,4059.9 ccw(c4271.9,4059.9) R7.1@4220.5,4008.5 ; MPU.24 4199.21,3997.79 v1(4207,3990) ; R7.1@4202.25,3993.51 ccw(c4186.31,4005.28) R7.1@4203.47,4015.18 ; 4603.16,3831.71 ccw(c4623.71,3831.71) v1@4609.18,3817.18 ; STM32.43 4603.16,3814.84 v1(4605,3813)
  Bottom Layer w11.81: v1@4202.82,3985.82 cw(c4192.74,3975.74) 4207,3975.74 cw(c4221.26,3975.74) v1@4211.18,3985.82 ; v1(4207,3990) 4207,3891 4285,3813 v1(4605,3813) ; v1@4600.82,3808.82 ccw(c4590.74,3798.74) 4590.74,3813 ccw(c4590.74,3827.26) v1@4600.82,3817.18
PB8: STM32.45
PB9: STM32.46
PB10: STM32.21
PB11: STM32.22
PB12: P1.2 STM32.25 | length 885.3
  Top Layer w11.81: STM32.25 4802,3585.18 ; STM32.25@4801.98,3614.73 ccw(c4816.79,3599.97) 4802,3585.18 ; 5079.88,3229.12 cw(c4991.75,3141) P1.2@5116.38,3141 ; 5100.04,3208.96 cw(c5032.08,3141) P1.2@5128.19,3141 ; 5120.2,3188.8 cw(c5072.4,3141) P1.2 5140,3169 4802,3507 4802,3585.18
PB13: P1.4 STM32.26 | length 812.4
  Top Layer w11.81: STM32.26 4813.58,3634.42 4840,3608 4840,3505 5028,3317 5086,3317 ; STM32.26@4801.98,3634.42 cw(c4801.98,3606.4) 4821.79,3626.21 ; 5105.6,3297.4 cw(c5051.01,3242.82) P1.4@5128.19,3241.24 ; P1.4@5116.38,3241.48 ccw(c5012.61,3243.6) 5086,3317 ; 5125.19,3277.81 cw(c5089.42,3242.03) P1.4 5140,3263 5086,3317
PB14: P1.6 STM32.27 | length 643.1
  Top Layer w11.81: STM32.27 4827.9,3654.1 4867,3615 4867,3519 4992,3394 5087,3394 P1.6 ; P1.6@5116.38,3341 ccw(c5059.35,3341) 5099.67,3381.33 ccw(c5140,3421.65) P1.6@5140,3364.62
PB15: P1.8 STM32.28 | length 607.4
  Top Layer w11.81: STM32.28 4847.21,3673.79 4895,3626 4895,3534 4988,3441 P1.8 ; P1.8@5123.3,3424.3 ccw(c5082.97,3383.97) 5082.97,3441 ccw(c5082.97,3498.03) P1.8@5123.3,3457.7
QD1: MS1.1 R4.1 STM32.10 | length 1085.9
  Top Layer w11.81: STM32.10 4526.9,3654.1 ; 4499.77,3654.1 cw(c4499.77,3608.77) v1@4531.82,3640.82 ; 4528.28,3654.1 cw(c4528.28,3637.28) v1@4540.18,3649.18 ; v1@4530.11,3645.44 ccw(c4519.07,3646.27) 4526.9,3654.1 ; v1@4535.56,3650.89 cw(c4534.73,3661.93) 4526.9,3654.1 ; v1(4536,3645) 4526.9,3654.1 ; v1@4862.82,4199.18 ccw(c4852.74,4209.26) 4867,4209.26 ccw(c4881.26,4209.26) v1@4871.18,4199.18 ; v1@4867,4193.48 cw(c4891.39,4193.48) MS1.1@4881.77,4215.89 ; v1(4867,4195) 4867,4217 MS1.1 ; MS1.1@4867,4211.4 cw(c4883.7,4211.4) MS1.1@4877.11,4226.74
  Bottom Layer w11.81: v1(4536,3645) 4605,3714 4641,3714 4718,3791 4718,3906 4867,4055 v1(4867,4195) ; v1@4536,3650.91 ccw(c4536,3665.16) 4546.08,3655.08 ccw(c4556.16,3645) v1@4541.91,3645 ; R4.1@4855.5,4183.5 cw(c4827.73,4155.73) 4867,4155.73 ; R4.1@4862.82,4190.82 cw(c4852.74,4180.74) 4867,4180.74 cw(c4881.26,4180.74) R4.1@4871.18,4190.82 ; 4867,4146.07 cw(c4919.93,4146.07) R4.1@4882.5,4183.5
QD2: MS2.1 R6.1 STM32.11 | length 1204.1
  Top Layer w11.81: v1@3830.82,3971.18 ccw(c3803.84,3998.16) 3842,3998.16 ; MS2.1@3833.45,4017.45 cw(c3812.8,3996.8) 3842,3996.8 cw(c3871.2,3996.8) MS2.1@3850.55,4017.45 ; v1(3835,3967) 3842,3974 MS2.1 ; v1(3991,3845) 3992,3844 4068,3844 4068,3740 4094,3714 4190,3714 4213,3691 4213,3629 4226,3616 4360,3616 4378.42,3634.42 STM32.11 ; v1@3995.18,3840.82 cw(c4002.84,3833.16) 4002.84,3844 ; v1@3995.18,3849.18 ccw(c4007.67,3861.67) 4007.67,3844
  Bottom Layer w11.81: R6.1@3820.5,3953.5 cw(c3785.49,3918.49) 3835,3918.49 ; R6.1@3830.82,3962.82 cw(c3820.74,3952.74) 3835,3952.74 cw(c3849.26,3952.74) R6.1@3839.18,3962.82 ; 3835,3923.32 cw(c3877.68,3923.32) R6.1@3847.5,3953.5 ; v1(3835,3967) 3835,3868 3858,3845 v1(3991,3845) ; v1@3986.82,3840.82 ccw(c3976.74,3830.74) 3976.74,3845 ccw(c3976.74,3859.26) v1@3986.82,3849.18
QD3: MS3.1 R8.1 STM32.12 | length 914.1
  Top Layer w11.81: MS3.1@3923.31,3219.04 cw(c3933.27,3211.55) MS3.1@3937.16,3223.39 ; MS3.1@3924.45,3220.55 ccw(c3889.32,3255.68) 3939,3255.68 ; v1@3934.82,3233.18 ccw(c3924.74,3243.26) 3939,3243.26 ccw(c3953.26,3243.26) v1@3943.18,3233.18 ; 3935.99,3244 ccw(c3943.67,3242.02) v1@3940.99,3234.56 ; v1(3939,3229) 3939,3315 4161,3537 4375.82,3537 STM32.12 ; 4403.14,3564.33 ccw(c4352.74,3614.73) STM32.12@4424.02,3614.73 ; 4423.31,3584.49 ccw(c4393.06,3614.73) STM32.12@4435.83,3614.73 ; 4443.47,3604.65 ccw(c4433.39,3614.73) STM32.12@4447.65,3614.73
QD4: MS4.1 R11.1 STM32.13 | length 1227.4
  Top Layer w11.81: STM32.13 4504.73,3609.27 4503.11,3610.89 4552.07,3610.89 v1(4575.18,3634) ; v1@4569.28,3634 cw(c4555.02,3634) 4565.1,3623.92 cw(c4575.18,3613.84) v1@4575.18,3628.09 ; MS4.1 5010,3163 v1(5010,3169)
  Bottom Layer w11.81: v1(4575.18,3634) 4620.18,3679 4642,3679 4689,3726 4758,3726 4821,3663 4821,3246 4837,3230 4949,3230 v1(5010,3169) ; v1@4575.18,3639.91 ccw(c4575.18,3654.16) 4585.26,3644.08 ccw(c4595.34,3634) v1@4581.09,3634 ; R11.1@4990.91,3169 ccw(c4944.81,3169) 4977.4,3201.6 ccw(c5010,3234.19) R11.1@5010,3188.09 ; R11.1@5004.09,3169 ccw(c4989.84,3169) 4999.92,3179.08 ccw(c5010,3189.16) R11.1@5010,3174.91
SCK: 1.5 STM32.15 | length 496.7
  Top Layer w11.81: STM32.15 4544.1,3151.9 ; 1.5@4549.39,3130.84 ccw(c4529.16,3136.95) 4544.1,3151.9 ; 1.5@4565.16,3146.61 cw(c4559.05,3166.84) 4544.1,3151.9 ; 1.5 4544.1,3151.9
TRIG: CSB.2 STM32.39 | length 765.6
  Top Layer w11.81: v1@4677.72,3952.72 cw(c4667.64,3942.64) 4681.9,3942.64 cw(c4696.15,3942.64) v1@4686.07,3952.72 ; STM32.39 v1(4681.9,3956.9)
  Bottom Layer w11.81: CSB.2@4475.3,4364.3 cw(c4456.7,4345.7) 4483,4345.7 ; 4483,4302.24 cw(c4570.76,4302.24) CSB.2@4508.7,4364.3 ; 4483,4330.76 cw(c4542.24,4330.76) CSB.2@4500.35,4372.65 ; CSB.2 4483,4372 4483,4231 4681.9,4032.1 v1(4681.9,3956.9) ; v1@4677.72,3961.07 ccw(c4667.64,3971.15) 4681.9,3971.15 ccw(c4696.15,3971.15) v1@4686.07,3961.07
VCC-3.3: 1.2 662.2 C2.1 C3.1 C6.2 C7.2 C8.2 C9.2 CSB.1 Ct.2 HW.1 MPU.8 MPU.13 POWER.2 POWER.4 POWER.6 POWER.8 R5.2 R7.2 R9.2 RL.1 RRST.2 STM32.1 STM32.9 STM32.24 STM32.36 STM32.48 SWD.1 | length 9667.1
  Top Layer w11.81: POWER.2@3827.3,3459.7 ccw(c3786.97,3500.03) 3844,3500.03 ccw(c3901.03,3500.03) POWER.2@3860.7,3459.7 ; POWER.4@3827.3,3526.3 cw(c3786.97,3485.97) 3844,3485.97 cw(c3901.03,3485.97) POWER.4@3860.7,3526.3 ; POWER.4@3827.3,3559.7 ccw(c3786.97,3600.03) 3844,3600.03 ccw(c3901.03,3600.03) POWER.4@3860.7,3559.7 ; POWER.6@3827.3,3626.3 cw(c3786.97,3585.97) 3844,3585.97 cw(c3901.03,3585.97) POWER.6@3860.7,3626.3 ; POWER.6@3827.3,3659.7 ccw(c3786.97,3700.03) 3844,3700.03 ccw(c3901.03,3700.03) POWER.6@3860.7,3659.7 ; POWER.8@3827.3,3726.3 cw(c3786.97,3685.97) 3844,3685.97 cw(c3901.03,3685.97) POWER.8@3860.7,3726.3 ; POWER.2 POWER.4 POWER.6 POWER.8 ; v1(4037,3910) 4094,3910 R9.2 C6.2 4319,3896 4383.73,3831.27 STM32.1 4502.73,3831.27 4504.73,3829.27 ; v1@4039.95,3904.89 cw(c4051.27,3885.28) 4057.13,3907.15 ; v1@4041.18,3905.82 cw(c4051.26,3895.74) 4051.26,3910 cw(c4051.26,3924.26) v1@4041.18,3914.18 ; v1@4046.49,3910 cw(c4046.49,3860.49) R9.2@4081.5,3895.5 ; 4051.32,3910 ccw(c4051.32,3952.68) R9.2@4081.5,3922.5 ; v1@4063.15,4260.15 cw(c4053.07,4250.07) 4067.32,4250.07 cw(c4081.58,4250.07) v1@4071.5,4260.15 ; MPU.13 v1(4067.32,4264.32) ; R9.2@4108.5,3895.5 cw(c4141.1,3862.9) 4141.1,3909 cw(c4141.1,3955.1) R9.2@4108.5,3922.5 ; 4158.49,3909 ccw(c4158.49,3958.51) R7.2@4193.5,3923.5 ; 4163.32,3909 cw(c4163.32,3866.32) R7.2@4193.5,3896.5 ; MPU.8 4179.53,4304.53 4185,4310 4185,4314 4235,4314 ; R7.2@4220.5,3896.5 cw(c4250.68,3866.32) 4250.68,3909 ; R7.2@4220.5,3923.5 ccw(c4255.51,3958.51) 4255.51,3909 ; v1@4229.82,4280.18 ccw(c4219.74,4290.26) 4234,4290.26 ccw(c4248.26,4290.26) v1@4238.18,4280.18 ; v1(4234,4276) 4234,4313 4235,4314 ; C6.2@4303.91,3909 ccw(c4303.91,3930.09) C6.2@4318.82,3915.18 ; C6.2@4305.5,3895.5 ccw(c4272.9,3862.9) 4272.9,3909 ccw(c4272.9,3955.1) C6.2@4305.5,3922.5 ; C6.2@4317.09,3911 ccw(c4348.71,3911) C6.2@4326.35,3888.65 ; C6.2@4319,3889.91 cw(c4319,3875.19) C6.2@4329.4,3885.6 ; C6.2@4319,3895.48 cw(c4330.21,3895.48) C6.2@4325.49,3905.64 ; C6.2@4320.05,3905.89 cw(c4308.39,3885.69) C6.2@4330.91,3891.73 ; C6.2@4326.28,3909 ccw(c4375.25,3909) 4340.63,3874.37 ; C6.2@4328.91,3911 ccw(c4389.03,3911) 4346.52,3868.48 ; v1(4331,3648) 4356.79,3673.79 STM32.9 4567,3673.79 ; v1@4331,3653.91 ccw(c4331,3668.16) 4341.08,3658.08 ccw(c4351.16,3648) v1@4336.91,3648 ; C6.2@4338.09,3909 ccw(c4415.58,3909) 4360.79,3854.21 ; CSB.1@4368.38,4381 cw(c4311.35,4381) 4351.67,4340.67 cw(c4392,4300.35) CSB.1@4392,4357.38 ; CSB.1 4325,4314 4235,4314 ; STM32.48 4504.73,3829.27 ; C9.2@4708,4012.91 cw(c4708,3966.81) 4740.6,3999.4 cw(c4773.19,4032) C9.2@4727.09,4032 ; C9.2 4774,3966 4774,3912 ; 4762.58,3479.42 cw(c4723.15,3440) C8.2@4778.91,3440 ; 1.2 4833,3085 4833,3256 4798,3291 C8.2 4798,3444 4721.27,3520.73 STM32.24 4721.27,3624.73 4650,3696 4623,3696 ; 1.2@4772,3047.62 ccw(c4772,3104.65) 4812.33,3064.33 ccw(c4852.65,3024) 1.2@4795.62,3024 ; 4772.23,3469.77 ccw(c4798,3495.54) C8.2@4798,3459.09 ; C8.2@4784.5,3426.5 cw(c4751.9,3393.9) 4798,3393.9 cw(c4844.1,3393.9) C8.2@4811.5,3426.5 ; v1@4796.82,3907.82 ccw(c4786.74,3897.74) 4786.74,3912 ccw(c4786.74,3926.26) v1@4796.82,3916.18 ; v1(4801,3912) 4774,3912 ; v1(4894,3912) 4896,3910 4937,3910 ; v1@4898.18,3916.18 ccw(c4913.09,3931.09) 4913.09,3910 ; 5024.08,3858.05 ccw(c5064.4,3898.38) 662.2@5064.4,3841.35 ; 5044.24,3837.89 ccw(c5064.4,3858.05) 662.2@5064.4,3829.54 ; C2.1@5055.5,3735.5 ccw(c5034,3757) 5064.4,3757 ; 662.2@5060.23,3795.83 cw(c5050.14,3785.75) 5064.4,3785.75 cw(c5078.66,3785.75) 662.2@5068.58,3795.83 ; 5064.4,3747.36 ccw(c5094.36,3747.36) C2.1@5073.18,3726.18 ; 5064.4,3750.69 ccw(c5097.69,3750.69) C2.1@5074.15,3727.15 ; 5064.4,3779.2 ccw(c5126.2,3779.2) C2.1@5082.5,3735.5 ; C2.1@5065.31,3726.61 ccw(c5059.5,3733.89) C2.1@5067.57,3738.55 ; v1(5069,3722) 5064.4,3726.6 662.2 5020.13,3862 4946,3862 4937,3871 4937,3910 ; Ct.2@5095.5,4077.5 cw(c5053.24,4035.24) 5113,4035.24 ; Ct.2@5103.85,4085.85 cw(c5081.76,4063.76) 5113,4063.76 ; Ct.2 5113,4087 5113,4034 5037,4034 4937,3934 4937,3910 ; 5113,4054.56 cw(c5145.44,4054.56) Ct.2@5122.5,4077.5 ; 4504.73,3829.27 4567,3767 4567,3673.79 ; 4567,3673.79 4600.79,3673.79 4623,3696 ; 4623,3696 4670.27,3743.27 4670.27,3831.27 STM32.36 4774,3832.82 4774,3912
  Bottom Layer w11.81: POWER.8@3836.38,3765.36 ccw(c3832.76,3776) 3844,3776 ; POWER.8@3851.62,3765.36 cw(c3855.24,3776) 3844,3776 ; 3851.6,3783.6 ccw(c3877.45,3757.75) POWER.8 3844,3776 ; POWER.8@3854.81,3747.76 cw(c3894.38,3765.21) 3863.8,3795.8 ; POWER.8@3865.61,3752.53 cw(c3911.32,3772.68) 3876,3808 ; v1@4032.82,3905.82 cw(c4023.95,3896.95) 4036.5,3896.95 ; 4036.5,3894.54 cw(c4052.46,3894.54) v1@4041.18,3905.82 ; v1(4037,3910) 4036.5,3909.5 4036.5,3820.5 4024,3808 3876,3808 ; v1(4067.32,4264.32) 4222.32,4264.32 v1(4234,4276) ; v1@4071.5,4260.15 cw(c4081.58,4250.07) 4081.58,4264.32 cw(c4081.58,4278.58) v1@4071.5,4268.5 ; RL.1@4153,3237 4218,3237 ; RL.1@4166.5,3223.5 cw(c4199.1,3190.9) 4199.1,3237 cw(c4199.1,3283.1) RL.1@4166.5,3250.5 ; 4191.55,4264.32 ccw(c4191.55,4318.45) v1@4229.82,4280.18 ; 4220.07,4264.32 ccw(c4220.07,4289.93) v1@4238.18,4271.82 ; 4234.24,3237 ccw(c4234.24,3296.76) RL.1@4276.5,3254.5 ; 4253.56,3237 cw(c4253.56,3204.56) 4276.5,3227.5 cw(c4195.62,3146.62) 4310,3146.62 ; 4262.76,3237 ccw(c4262.76,3268.24) RL.1@4284.85,3246.15 ; RL.1@4284.85,3235.85 cw(c4224.13,3175.13) 4310,3175.13 ; RL.1@4286,3237 4218,3237 ; RL.1@4290,3241 4310,3221 HW.1 ; RL.1@4293.2,3244.2 cw(c4252.65,3203.65) 4310,3203.65 ; HW.1@4293.3,3040.7 ccw(c4252.97,3081.03) 4310,3081.03 ccw(c4367.03,3081.03) HW.1@4326.7,3040.7 ; RRST.2@4305.5,3520.5 cw(c4272.9,3487.9) 4319,3487.9 cw(c4365.1,3487.9) RRST.2@4332.5,3520.5 ; RRST.2@4305.5,3547.5 ccw(c4272.9,3580.1) 4319,3580.1 ccw(c4365.1,3580.1) RRST.2@4332.5,3547.5 ; 4319,3577.76 cw(c4399.24,3577.76) C7.2@4342.5,3634.5 ; 4319,3604.77 cw(c4374.23,3604.77) C7.2@4335.18,3643.82 ; 4319,3606.27 cw(c4370.73,3606.27) C7.2@4334.15,3642.85 ; C7.2@4319,3633.29 cw(c4345.71,3633.29) C7.2@4326.82,3652.18 ; 4322.29,3622.31 ccw(c4295.23,3637.94) C7.2@4325.31,3646.4 ; v1(4323,3911) 4370,3911 4402,3943 C3.1 ; C7.2@4325.09,3648 cw(c4310.84,3648) 4320.92,3637.92 cw(c4331,3627.84) C7.2@4331,3642.09 ; v1@4327.18,3906.82 cw(c4337.26,3896.74) 4337.26,3911 cw(c4337.26,3925.26) v1@4327.18,3915.18 ; v1(4331,3648) 4319,3636 RRST.2 4319,3468 4218,3367 4218,3237 ; CSB.1@4375.3,4364.3 cw(c4334.97,4323.97) 4392,4323.97 cw(c4449.03,4323.97) CSB.1@4408.7,4364.3 ; C3.1@4388.5,4101.5 cw(c4355.9,4068.9) 4402,4068.9 cw(c4448.1,4068.9) C3.1@4415.5,4101.5 ; C3.1@4392,4125 CSB.1 ; 4392,4156.73 ccw(c4443.73,4156.73) C3.1@4407.15,4120.15 ; 4392,4185.24 ccw(c4472.24,4185.24) C3.1@4415.5,4128.5 ; v1(4801,3912) v1(4894,3912) ; v1@4805.18,3907.82 cw(c4815.26,3897.74) 4815.26,3912 cw(c4815.26,3926.26) v1@4805.18,3916.18 ; v1@4889.82,3907.82 ccw(c4879.74,3897.74) 4879.74,3912 ccw(c4879.74,3926.26) v1@4889.82,3916.18 ; R5.2 5031,3653 5031,3684 v1(5069,3722) 5090,3722 5211,3601 SWD.1 cw(c5228,3642.04) SWD.1@5198.98,3613.02 ; R5.2@4982,3623.09 ccw(c4982,3669.19) 5014.6,3636.6 ccw(c5047.19,3604) R5.2@5001.09,3604 ; v1@5063.09,3722 cw(c5048.84,3722) 5058.92,3711.92 cw(c5069,3701.84) v1@5069,3716.09 ; v1@5073.18,3717.82 cw(c5083.26,3707.74) 5083.26,3722 cw(c5083.26,3736.26) v1@5073.18,3726.18 ; 5158.65,3653.35 ccw(c5228,3722.69) SWD.1@5228,3624.62 ; 5178.82,3633.18 ccw(c5228,3682.37) SWD.1@5228,3612.81 ; SWD.1@5199.7,3612.3 cw(c5188.39,3601) SWD.1@5204.38,3601 ; 3844,3776 3876,3808
VCC-3.7: 662.3 BAT.1 C1.1 M1.1 M2.1 M3.1 M4.1 S1.2 S2.2 S3.2 S4.2 | length 6524.8
  Top Layer w19.68: v1(4987,3903) 5021.72,3903 662.3 5027,3942 5082,3997 5207,3997 5230,4020 BAT.1 ; 5009.51,3903 ccw(c5009.51,3925.76) 662.3@5025.61,3909.67 ; 662.3@5028.97,3925.99 cw(c5072.37,3925.99) 5041.68,3956.68 ; M1.1@5084,4381.31 cw(c5084,4333.79) 5117.6,4367.4 cw(c5151.21,4401) M1.1@5103.69,4401 ; M1.1 5186,4299 5252,4299 5279,4272 5279,4111 ; BAT.1@5216.08,4078.08 cw(c5182.48,4044.48) 5230,4044.48 cw(c5277.52,4044.48) BAT.1@5243.92,4078.08 ; BAT.1@5241.51,4107.97 ccw(c5258.47,4131.52) 5279,4111 ; BAT.1@5248.06,4084.16 cw(c5260,4078.98) 5260,4092 ; BAT.1@5248.06,4099.84 ccw(c5260,4105.02) 5260,4092 ; 5262.63,4094.63 cw(c5244.77,4112.5) BAT.1 ; BAT.1 5260,4092 ; 5260,4092 5279,4111
  Bottom Layer w19.68: M2.1@3835,4350.31 cw(c3835,4302.79) 3868.6,4336.4 cw(c3902.21,4370) M2.1@3854.68,4370 ; M2.1 3898,4307 3898,4163.26 S2.2 3889.26,4060 3803,4060 3778,4035 3778,3020 3825,2973 3893,2973 M3.1 ; 3913.34,4084.08 ccw(c3881.41,4116) 3926.56,4116 ccw(c3881.41,4116) 3913.34,4147.92 ; M3.1@3925.32,3025 cw(c3877.79,3025) 3911.4,2991.4 cw(c3945,2957.79) 3945,3005.32 cw(c3945,2957.79) 3978.6,2991.4 cw(c4012.21,3025) 3964.68,3025 cw(c4012.21,3025) 3978.6,3058.6 cw(c3945,3092.21) M3.1@3945,3044.68 ; S3.2 3995.26,3075.26 M3.1 ; 4950.78,2961 cw(c4950.78,2934.8) S4.2@4969.3,2953.33 ; S1.2 5066.74,4418.26 M1.1 ccw(c5042.33,4359.33) 5042.33,4418.26 ; S1.2@4987.88,4400.09 cw(c5009.68,4388.9) 5016.02,4412.58 ; S1.2@4994.81,4418.26 cw(c4994.81,4311.81) M1.1@5070.08,4387.08 ; 5038.56,2971.74 ccw(c5038.56,3088.44) M4.1@5121.08,3005.92 ; 5086.09,2971.74 ccw(c5086.09,3040.91) M4.1 5114.74,2971.74 S4.2 4959.26,2961 4009,2961 M3.1
  Bottom Layer w23.62: v1(4987,3903) 5123,3903 5177,3849 5253,3849 5296,3806 5296,2970 5270,2944 5159.19,2944 ; C1.1@4996.33,3893.67 cw(c5018.84,3871.16) 5018.84,3903 cw(c5018.84,3934.84) C1.1@4996.33,3912.33 ; M4.1 5135,2968.19 5159.19,2944 ; M4.1@5151.28,2985.02 ccw(c5185.54,2970.35) 5159.19,2944
pads on no net: MPU.0 MPU.2 MPU.3 MPU.4 MPU.5 MPU.6 MPU.7 MPU.12 MPU.14 MPU.15 MPU.16 MPU.17 MPU.19 MPU.21 MPU.22 STM32.2 STM32.3 STM32.4 STM32.40 STM32.41

## Polygon pours and split planes (outlines as drawn)
VCC-3.7 on Top Layer "Top Layer-No Net" (solid, remove dead copper, pour order 6): 2020.53,4522.53 3598.14,4522.53 3599.34,4521.34 3599.34,2946.53 2021.73,2946.53 2020.53,2947.73
GND on Bottom Layer "Top Layer-No Net" (solid, remove dead copper, pour order 8): 5431.51,4470.45 5432.71,4469.26 7006.51,4469.26 7006.51,2898.26 7010.31,2894.45 7009.12,2895.65 5431.51,2895.65

## Keep-outs
Keep-Out Layer:
  lines w10: 3752,2915.2 3752,4490 ; 3756,2914 5330.8,2914 5330.8,4488.8 3756,4488.8

## Silkscreen, mask and mechanical layers (free items; w line width, h text height)
Top Overlay:
  text "+" at 4979,4402 h45
  text "+" at 3894,4362 h45
  text "-" at 5210,4246 h45
  text "F103" at 4485,4159 h65
  text "+" at 5129,3572 h45
  text "+" at 3826,3344 h45
  text "-" at 3929,3343 h45
  text "IMU Core V1.0" at 4443,3283 h90
  text "+" at 5034,2988 h45
  text "+" at 3934,2930 h45
Bottom Overlay:
  text "BY QY&CYQ" at 5072,3401 h65
  text "2013/8/30" at 4866,3285 h45